# Altium PCB MICRO-USB-SMD_MICRO-USB-A7_2021-12-13.pcbdoc
Units mm, origin at the board's own origin, x right, y up, seen from the top; angles counter-clockwise.
Board outline 36.7 x 31.83 mm, 2 copper layers (Top Layer, Bottom Layer); 1 components, 0 nets, 11 pads, 0 vias.
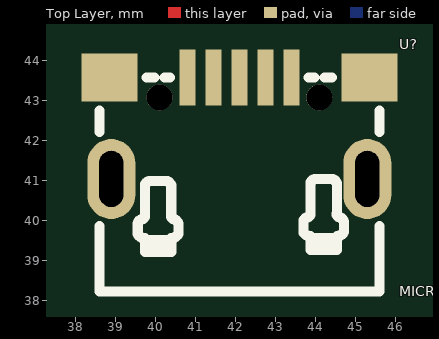
[diagram p0: Top Layer view]
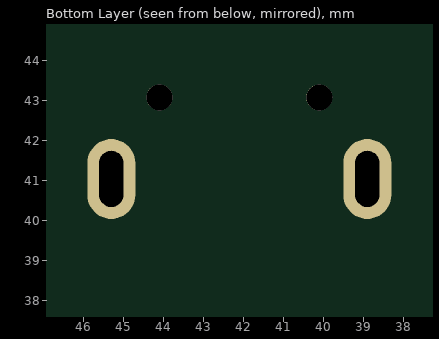
[diagram p1: Bottom Layer view, seen from below]

## Layer stack, top to bottom
Top Layer: signal copper (thickness not stored)
Dielectric: dielectric 0.32, FR-4, Dk 4.8
Bottom Layer: signal copper (thickness not stored)

## Board outline
62.102,25.4 25.4,25.4 25.4,57.231 62.102,57.231

## Components (designator, comment, footprint, x,y, rotation, side; value= is the part's Value field where it differs from the comment)
U? "MICRO-USB-SMD_MICRO-USB-A7" MICRO-USB-SMD_MICRO-USB-A7 42.1,41.189 r0 top

## Footprints (in the part's own frame and the unit in brackets; to place one, negate y for a bottom-side part, rotate by r counter-clockwise, add the part's x,y. Pads: shape width x height; smd on the part's side, far side on the other; paste and mask are expansions set on the pad)
MICRO-USB-SMD_MICRO-USB-A7 [mm]
  rect 0.4x1.4 smd: 1(-1.3,2.388) 2(-0.65,2.388) 3(0,2.388) 4(0.65,2.388) 5(1.3,2.388)
  rect 1.4x1.2 smd: 6(-3.25,2.388) 7(3.25,2.388)
  oval 1.2x2 hole 0.6 slot 1.4 at 90 deg: 8(-3.2,-0.152) 9(3.2,-0.152)
  round 0.65 hole 0.65 unplated: ""(-1.999,1.888) ""(1.999,1.888)
  silkscreen extent -3.5,-2.96 3.5,2.39

## Nets (pads, with @x,y where several pads share a name; then routed paths per layer and width w, separated by ;. In a path a pad name is that pad's centre, name@x,y a point inside that pad or via, vN(x,y) a via of type N, cw(c..) or ccw(c..) an arc to the next point about the centre after c; other vN are vias at no path point)
pads on no net: U?. U?.1 U?.2 U?.3 U?.4 U?.5 U?.6 U?.7 U?.8 U?.9

## Silkscreen, mask and mechanical layers (free items; w line width, h text height)
Document:
  lines w0.003: 43.726,41.29 43.776,41.341